# Altium PCB DSPboard.PCBDOC (part 2 of 2)
Units mil, origin at the board's own origin, x right, y up, seen from the top; angles counter-clockwise.
Board outline 6250 x 3000 mil, 4 copper layers (Top Layer, Internal Plane 1, Internal Plane 2, Bottom Layer); 133 components, 118 nets, 891 pads, 424 vias.
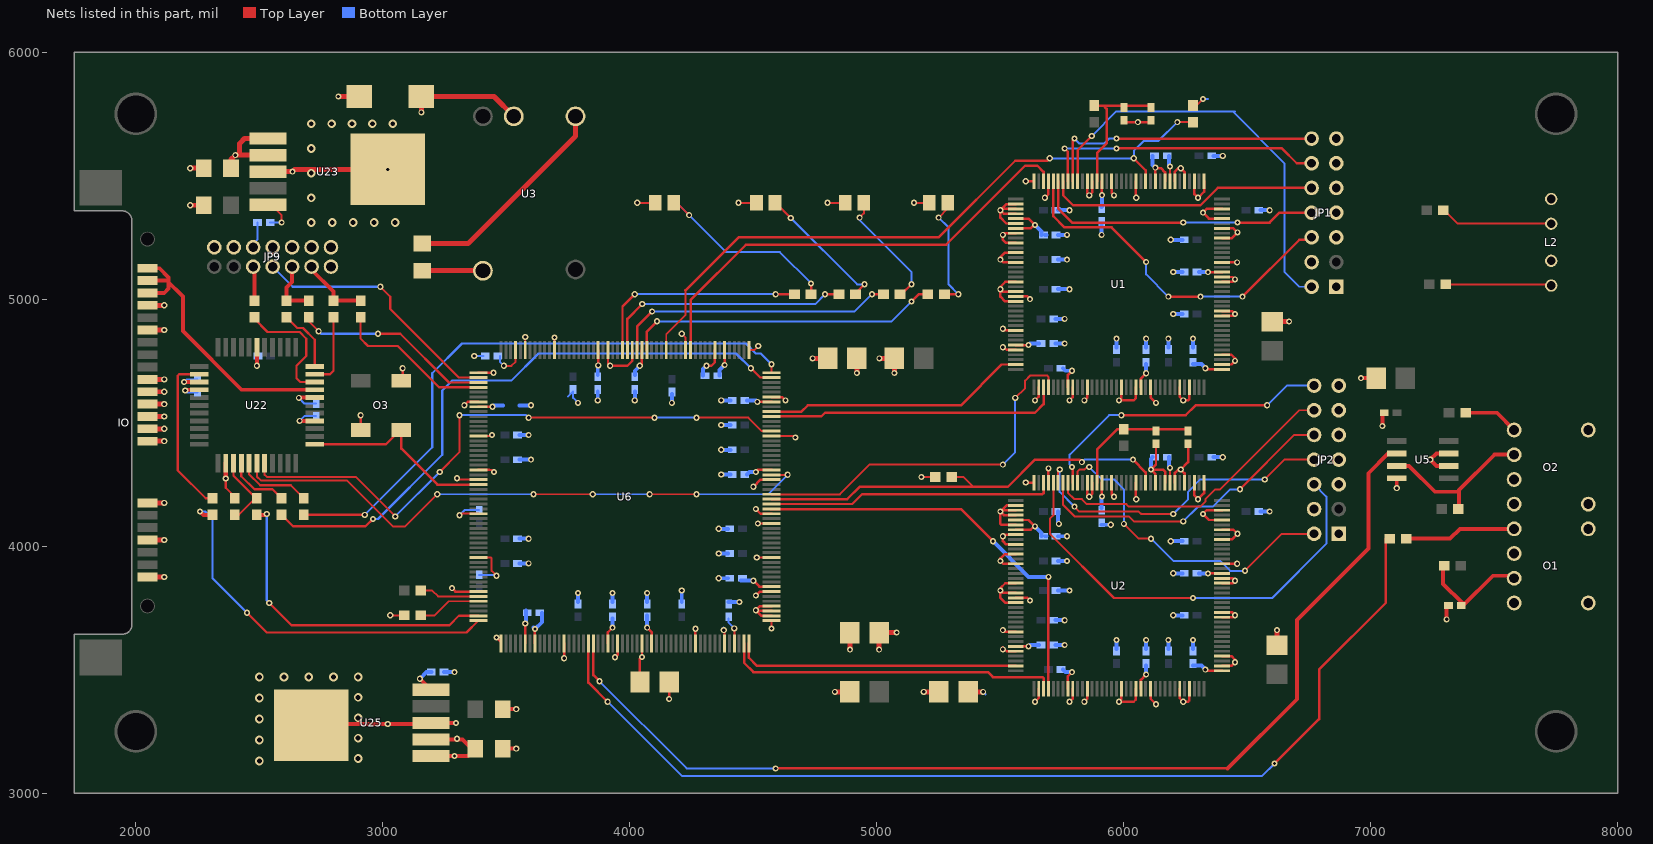
[diagram p4: the nets of this part, all layers, seen from the top]

## Via types
v1: diameter 25, hole 13.5, Top Layer to Bottom Layer, 398 vias
v2: diameter 35, hole 20, Top Layer to Bottom Layer, 26 vias

## Nets (pads, with @x,y where several pads share a name; then routed paths per layer and width w, separated by ;. In a path a pad name is that pad's centre, name@x,y a point inside that pad or via, vN(x,y) a via of type N, cw(c..) or ccw(c..) an arc to the next point about the centre after c; other vN are vias at no path point) (continued)
GND: C1.1 C2.1 C3.2 C6.2 C7.1 C8.1 C9.1 C10.1 C11.1 C12.1 C13.1 C14.1 C15.1 C16.1 C17.1 C18.1 C19.1 C20.1 C21.1 C22.1 C23.1 C24.1 C25.1 C26.1 C27.1 C28.1 C29.1 C30.1 C31.1 C35.1 C36.1 C37.1 C38.1 C39.1 C40.1 C41.1 C43.1 C44.1 C45.1 C46.1 C47.1 C48.1 C50.1 C51.1 C52.1 C53.1 C54.1 C57.1 C58.1 C59.1 C60.1 C62.1 C63.1 C64.1 C65.1 C66.1 C67.1 C68.1 C69.1 C70.1 C71.1 C74.1 C75.1 C76.1 C77.1 C78.1 C79.1 C80.1 C81.1 C82.1 C83.1 C84.1 C87.1 C88.1 C89.2 C92.2 C96.2 C98.2 C99.2 C100.2 C101.2 C102.2 C103.2 C106.2 C107.2 C108.2 DS1.2 DS2.2 DS3.2 DS4.2 IO.1 IO.4 IO.7 IO.P4 IO.P5 IO.P6 IO.P10 IO.P12 JP1.1 JP1.4 JP1.5 JP1.7 JP1.9 JP1.11 JP1.13 JP2.1 JP2.4 JP2.5 JP2.7 JP2.9 JP2.11 JP2.13 JP9.1 JP9.3 JP9.5 JP9.7 JP9.9 JP9.11 JP9.13 L2.2 L2.4 O1.2 O1.4 O1.5 O1.8 O2.3 O2.4 O2.5 O2.8 O3.2 R9.1 R15.2 R16.1 R27.2 U1.2 U1.3 U1.4 U1.6 U1.8 U1.10 U1.12 U1.14 U1.18 U1.20 U1.22 U1.28 U1.32 U1.38 U1.44 U1.48 U1.55 U1.58 U1.61 U1.67 U1.69 U1.74 U1.76 U1.84 U1.85 U1.91 U1.92 U1.95 U1.100 U1.102 U1.104 U1.106 U1.109 U1.111 U1.113 U1.115 U1.117 U1.119 U1.123 U1.128 U1.132 U1.133 U1.141 U2.2 U2.3 U2.4 U2.6 U2.8 U2.10 U2.12 U2.14 U2.18 U2.20 U2.22 U2.28 U2.32 U2.38 U2.44 U2.48 U2.55 U2.58 U2.61 U2.67 U2.69 U2.74 U2.76 U2.84 U2.85 U2.91 U2.92 U2.95 U2.100 U2.102 U2.104 U2.106 U2.109 U2.111 U2.113 U2.115 U2.117 U2.119 U2.123 U2.128 U2.132 U2.133 U2.141 U3.1 U5.4 U5.6 U5.7 U6.1 U6.8 U6.14 U6.25 U6.30 U6.41 U6.47 U6.53 U6.59 U6.66 U6.75 U6.82 U6.91 U6.99 U6.105 U6.112 U6.118 U6.129 U6.134 U6.145 U6.151 U6.157 U6.163 U6.170 U6.179 U6.186 U6.195 U6.202 U22.4 U22.17 U22.25 U23.3 U25.3 | length 15709.1
  Top Layer w8: v1(3030,3720) R9.1@3086.54,3720 ; v1@3300,4280 3311.1,4268.9 U6.179@3386.5,4268.9 ; v1@3310,4120 3321.1,4131.1 U6.186@3386.5,4131.1 ; U6.195@3386.5,3953.94 3436.06,3953.94 3440,3950 3440,3900 v1(3460,3880) ; U6.170@3386.5,4446.06 3446.06,4446.06 v1(3442.13,4450) ; U6.151@3576.46,4793.5 v1(3576.46,4846.46) ; U6.145@3694.57,4793.5 v1(3694.57,4844.57) ; U6.134@3911.1,4793.5 3911.1,4738.9 v1(3920,4730) ; v1(4030,5390) DS4.2@4100,5390 ; v1(4048.9,3551.1) U6.30@4048.9,3606.5 ; v1(4210,4860) 4226.06,4843.94 U6.118@4226.06,4793.5 ; v1(4380,3660) 4383.54,3656.46 U6.47@4383.54,3606.5 ; v1(4440,5390) DS3.2@4510,5390 ; U6.105@4481.97,4793.5 4503.5,4793.5 v1(4520,4810) ; v1(4513.94,3953.94) U6.66@4573.5,3953.94 ; v1(4573.5,3666.5) U6.53@4573.5,3698.03 ; U6.91@4573.5,4446.06 4663.94,4446.06 v1(4670,4440) ; v1(4800,5390) DS2.2@4880,5390 ; v1(5150,5390) DS1.2@5210,5390 ; v1(5180,4280) R15.2@5236.54,4280 ; R16.1@6280,5783.46 6293.46,5783.46 v1(6320,5810)
  Top Layer w10: O3.2@2910,4470 v1(2910,4530) ; v1(3280,3830) 3293.86,3816.14 U6.202@3386.5,3816.14 ; v1(3330,4570) 3343.86,4583.86 U6.163@3386.5,4583.86 ; U6.157@3386.5,4701.97 v1(3448.03,4701.97) ; v1(3460,3630) U6.1@3478.03,3611.97 ; U6.8@3615.83,3606.5 v1(3615.83,3664.17) ; v1(3733.94,3546.06) U6.14@3733.94,3606.5 ; v1(3920,4730) 3990,4730 4009.53,4749.53 U6.129@4009.53,4793.5 ; v1(3940,3550) 3950,3560 U6.25@3950,3610 ; C101.2@4040.94,3450 4040.94,3543.15 v1(4048.9,3551.1) ; U6.41@4265.43,3606.5 v1(4265.43,3665.43) ; v1(4310,4730) 4330,4730 4344.17,4744.17 U6.112@4344.17,4793.5 ; v1(4500,4240) 4528.9,4268.9 U6.82@4573.5,4268.9 ; v1(4510,3800) 4526.14,3816.14 U6.59@4573.5,3816.14 ; v1(4510,4150) 4528.9,4131.1 U6.75@4573.5,4131.1 ; U6.99@4573.5,4603.54 4616.46,4603.54 v1(4630,4590) ; v1(5500,3820) 5509.53,3810.47 U2.20@5562.68,3810.47 ; v1(5500,3940) 5511.42,3928.58 U2.14@5562.68,3928.58 ; v1@5500,3950 5517.95,3967.95 U2.12@5562.68,3967.95 ; v1(5500,5040) 5509.53,5030.47 U1.20@5562.68,5030.47 ; v1(5500,5160) 5511.42,5148.58 U1.14@5562.68,5148.58 ; v1@5500,5170 5517.95,5187.95 U1.12@5562.68,5187.95 ; v1@5505.12,4145.12 U2.3@5562.68,4145.12 ; v1@5505.12,5365.12 U1.3@5562.68,5365.12 ; v1@5510,3590 5525.75,3574.25 U2.32@5562.68,3574.25 ; v1(5510,3660) 5517.01,3652.99 U2.28@5562.68,3652.99 ; v1@5510,4810 5525.75,4794.25 U1.32@5562.68,4794.25 ; v1(5510,4880) 5517.01,4872.99 U1.28@5562.68,4872.99 ; U2.22@5562.68,3771.1 5518.9,3771.1 5500,3790 5500,3830 5519.84,3849.84 U2.18@5562.68,3849.84 ; U2.10@5562.68,4007.32 5522.68,4007.32 5510,4020 v1(5510,4040) 5516.69,4046.69 U2.8@5562.68,4046.69 ; U2.6@5562.68,4086.06 5503.94,4086.06 5500,4090 v1(5500,4140) ; U2.4@5562.68,4125.43 5514.57,4125.43 v1(5500,4140) ; U2.2@5562.68,4164.8 5524.8,4164.8 v1(5500,4140) ; U1.22@5562.68,4991.1 5518.9,4991.1 5500,5010 5500,5050 5519.84,5069.84 U1.18@5562.68,5069.84 ; U1.10@5562.68,5227.32 5522.68,5227.32 5510,5240 v1(5510,5260) 5516.69,5266.69 U1.8@5562.68,5266.69 ; U1.6@5562.68,5306.06 5523.94,5306.06 5500,5330 v1(5500,5360) ; U1.4@5562.68,5345.43 5514.57,5345.43 v1(5500,5360) ; U1.2@5562.68,5384.8 5524.8,5384.8 v1(5500,5360) ; v1(5640,3370) 5655.2,3385.2 U2.38@5655.2,3422.68 ; v1(5640,4590) 5655.2,4605.2 U1.38@5655.2,4642.68 ; v1(5680,5410) 5694.57,5424.57 U1.141@5694.57,5477.32 ; U2.141@5694.57,4257.32 v1(5694.57,4314.57) ; U2.44@5773.31,3422.68 5773.31,3473.31 v1(5790,3490) ; U1.44@5773.31,4642.68 5773.31,4693.31 v1(5790,4710) ; v1(5840,3370) 5852.05,3382.05 U2.48@5852.05,3422.68 ; v1(5840,4590) 5852.05,4602.05 U1.48@5852.05,4642.68 ; U2.133@5852.05,4257.32 5852.05,4207.95 v1(5860,4200) 5871.73,4211.73 U2.132@5871.73,4257.32 ; U1.133@5852.05,5477.32 5852.05,5427.95 v1(5860,5420) 5871.73,5431.73 U1.132@5871.73,5477.32 ; U2.128@5950.47,4257.32 5950.47,4209.53 v1(5960,4200) ; U1.128@5950.47,5477.32 5950.47,5429.53 v1(5960,5420) ; U2.55@5989.84,3422.68 5989.84,3379.84 v1(5980,3370) 6040,3370 6048.9,3378.9 U2.58@6048.9,3422.68 ; U1.55@5989.84,4642.68 5989.84,4599.84 v1(5980,4590) 6040,4590 6048.9,4598.9 U1.58@6048.9,4642.68 ; C1.1@6000,5716.54 C2.1@6110,5716.54 ; U2.123@6048.9,4257.32 6048.9,4191.1 v1(6050,4190) ; U1.123@6048.9,5477.32 6048.9,5411.1 v1(6050,5410) ; U2.61@6107.95,3422.68 6107.95,3382.05 v1(6130,3360) ; U1.61@6107.95,4642.68 6107.95,4602.05 v1(6130,4580) ; U2.119@6127.64,4257.32 6127.64,4292.36 v1(6110,4310) ; U1.119@6127.64,5477.32 v1(6127.64,5532.36) ; C30.1@6130,4406.54 6130,4330 v1(6110,4310) ; 6140,5530 6150,5530 6167.01,5512.99 U1.117@6167.01,5477.32 ; U2.117@6167.01,4257.32 6167.01,4302.11 6159.11,4310 v1(6110,4310) ; U2.115@6206.38,4257.32 6206.38,4296.38 6220,4310 v1(6230,4310) ; U1.115@6206.38,5477.32 6206.38,5516.38 6220,5530 v1(6230,5530) 6245.75,5514.25 U1.113@6245.75,5477.32 ; U2.67@6226.06,3422.68 6226.06,3383.94 v1(6240,3370) 6260,3370 6265.43,3375.43 U2.69@6265.43,3422.68 ; U1.67@6226.06,4642.68 6226.06,4603.94 v1(6240,4590) 6260,4590 6265.43,4595.43 U1.69@6265.43,4642.68 ; U2.113@6245.75,4257.32 6245.75,4294.25 v1(6230,4310) ; C29.1@6260,4406.54 6260,4340 v1(6230,4310) ; U2.111@6285.12,4257.32 6285.12,4204.88 v1(6300,4190) 6324.49,4214.49 U2.109@6324.49,4257.32 ; U1.111@6285.12,5477.32 6285.12,5424.88 v1(6300,5410) 6324.49,5434.49 U1.109@6324.49,5477.32 ; U2.74@6397.32,3515.2 6435.2,3515.2 v1(6450,3530) 6450,3540 6435.43,3554.57 U2.76@6397.32,3554.57 ; U2.84@6397.32,3712.05 6442.05,3712.05 v1(6450,3720) 6438.27,3731.73 U2.85@6397.32,3731.73 ; U2.91@6397.32,3849.84 6439.84,3849.84 v1(6450,3860) 6440.47,3869.53 U2.92@6397.32,3869.53 ; U2.95@6397.32,3928.58 v1(6458.58,3928.58) ; U2.100@6397.32,4027.01 6437.01,4027.01 v1(6460,4050) 6443.62,4066.38 U2.102@6397.32,4066.38 ; U2.104@6397.32,4105.75 6344.25,4105.75 v1(6320,4130) 6335.12,4145.12 U2.106@6397.32,4145.12 ; U1.74@6397.32,4735.2 6435.2,4735.2 v1(6450,4750) 6450,4760 6435.43,4774.57 U1.76@6397.32,4774.57 ; U1.84@6397.32,4932.05 6442.05,4932.05 v1(6450,4940) 6438.27,4951.73 U1.85@6397.32,4951.73 ; U1.91@6397.32,5069.84 6439.84,5069.84 v1(6450,5080) 6440.47,5089.53 U1.92@6397.32,5089.53 ; U1.95@6397.32,5148.58 v1(6458.58,5148.58) ; U1.100@6397.32,5247.01 6437.01,5247.01 v1(6460,5270) 6443.62,5286.38 U1.102@6397.32,5286.38 ; U1.104@6397.32,5325.75 6344.25,5325.75 v1(6320,5350) 6335.12,5365.12 U1.106@6397.32,5365.12
  Top Layer w16: v1(2195.51,4664.49) U22.25@2255.75,4664.49 ; v1(2490,4730) U22.17@2490,4804.25 ; v1(2662.99,4507.01) U22.4@2724.25,4507.01 ; U25.3@2710,3275 2715,3280 U25.3@3200,3280 ; U25.3@3195,3284 v1(3296,3284) ; C87.1@3480,3180 v1(3540,3180) ; C88.1@3480,3340 v1(3540,3340) ; v1(6960,4680) C108.2@7020.94,4680 ; v1(7046.54,4486.54) C106.2@7046.54,4540 ; v1(7104.69,4234.69) U5.4@7104.69,4275 ; v1(7306.54,3703.46) C107.2@7306.54,3760 ; U5.6@7315.31,4325 7265,4325 v1(7240,4350) 7265,4375 U5.7@7315.31,4375
  Top Layer w20: IO.1@2047.24,3875 v1(2115,3875) ; IO.4@2047.24,4025 v1(2115,4025) ; IO.7@2047.24,4175 v1(2115,4175) ; IO.P4@2047.24,4575 v1(2115,4575) ; IO.P5@2047.24,4625 v1(2115,4625) ; IO.P6@2047.24,4675 v1(2115,4675) ; IO.P10@2047.24,4875 v1(2115,4875) ; IO.P12@2047.24,4975 v1(2115,4975) ; v1(2220,5380) C82.1@2274.88,5380 ; v1(2220,5530) C81.1@2274.88,5530 ; U23.3@2535,5516 v1(2634,5516) ; 2643,5525 v1(3020,5525) ; v1(2820,5820) C6.2@2900,5820 ; R27.2@3160,5225.12 3345.12,5225.12 3780,5660 U3.1@3780,5740 ; v1(4740,4760) C103.2@4800.94,4760 ; v1(4830,3410) C96.2@4890.94,3410 ; v1(4890.94,3580.94) C92.2@4890.94,3650 ; v1(5010,4760) C98.2@5070.94,4760 v1(5070.94,4700.94) ; v1(5190,3410) C99.2@5250.94,3410 ; C100.2@6600,4909.06 v1(6669.06,4909.06) ; C102.2@6620,3599.06 v1(6620,3660)
  Bottom Layer w8: v1(2195.51,4664.49) 2204.86,4673.84 C21.1@2250,4673.84 ; JP9.9@2470,5220 2492.66,5242.66 C3.2@2492.66,5310 ; v1(2490,4730) C14.1@2490,4765.59 ; v1(2662.99,4507.01) 2682.14,4526.16 C27.1@2730,4526.16 ; v1(3310,4125) 3330.59,4145.59 C31.1@3390,4145.59 ; v1(3370,4770) C83.1@3406.54,4770 ; C28.1@3390,3883.84 v1@3456.16,3883.84 ; v1@3440,4450 v1(3442.13,4450) ; 3750,4606.54 3770,4626.54 3770,4600 v1(3790,4580) ; v1(4380,3660) v1@4380,3670 ; v1@4510,3950 v1(4513.94,3953.94) ; v1(6320,5810) 6340,5810 ; v1(6669.06,4909.06) v1@6670,4910
  Bottom Layer w16: C89.2@3247.34,3490 v1(3290,3490) ; C62.1@3553.46,3930 v1(3590,3930) ; C58.1@3553.46,4030 v1(3590,4030) ; C57.1@3553.46,4350 v1(3600,4350) ; C63.1@3553.46,4450 v1(3590,4450) ; 3553.46,4570 v1(3600,4570) ; v1@3610,3670 v1(3615.83,3664.17) 3643.46,3691.81 C84.1@3643.46,3730 ; C69.1@3790,3773.46 v1(3790,3810) ; v1(3870,4590) C70.1@3870,4626.54 ; C74.1@3930,3773.46 v1(3930,3810) ; v1(4020,4590) C71.1@4020,4626.54 ; C75.1@4070,3773.46 v1(4070,3810) ; v1(4170,4580) C65.1@4170,4616.54 ; C68.1@4210,3773.46 v1(4210,3820) ; C80.1@4296.54,4690 4296.54,4716.54 v1(4310,4730) ; v1(4360,3870) C77.1@4396.54,3870 ; v1(4360,3970) C67.1@4396.54,3970 ; v1(4360,4070) C59.1@4396.54,4070 ; v1(4370,4290) C78.1@4406.54,4290 ; v1(4370,4390) C60.1@4406.54,4390 ; v1(4370,4490) C66.1@4406.54,4490 ; v1(4370,4590) C79.1@4406.54,4590 ; C76.1@4400,3773.46 v1(4443.46,3773.46) ; C39.1@5723.46,3600 v1(5760,3600) ; C38.1@5723.46,3700 v1(5760,3700) ; C11.1@5723.46,4820 v1(5760,4820) ; C10.1@5723.46,4920 v1(5760,4920) ; C37.1@5733.46,3820 v1(5780,3820) ; C36.1@5733.46,3940 v1(5770,3940) ; C41.1@5733.46,4040 v1(5770,4040) ; C35.1@5733.46,4140 5733.46,4093.46 v1(5736.93,4090) ; C9.1@5733.46,5040 v1(5780,5040) ; C8.1@5733.46,5160 v1(5770,5160) ; C13.1@5733.46,5260 v1(5770,5260) ; C7.1@5733.46,5360 v1(5780,5360) ; C40.1@5753.46,3500 5763.46,3490 v1(5790,3490) ; C12.1@5753.46,4720 5763.46,4710 v1(5790,4710) ; C51.1@5910,4086.54 v1(5946.54,4086.54) ; v1(5910,5260) C23.1@5910,5306.54 ; C44.1@5970,3583.46 v1(5970,3620) ; C16.1@5970,4803.46 v1(5970,4840) ; C43.1@6090,3583.46 v1(6090,3620) ; C15.1@6090,4803.46 v1(6090,4840) ; v1(6110,4310) 6110,4353.46 C53.1@6116.54,4360 ; C25.1@6116.54,5580 6116.54,5543.46 v1(6127.64,5532.36) ; C46.1@6180,3583.46 v1(6180,3620) ; C18.1@6180,4803.46 v1(6180,4840) ; v1(6190,4020) C50.1@6236.54,4020 ; v1(6190,5240) C22.1@6236.54,5240 ; v1(6200,3720) C48.1@6236.54,3720 ; v1(6200,3890) C47.1@6236.54,3890 ; v1(6200,4940) C20.1@6236.54,4940 ; v1(6200,5110) C19.1@6236.54,5110 ; C45.1@6280,3583.46 v1(6280,3620) ; C17.1@6280,4803.46 v1(6280,4840) ; C54.1@6363.46,4360 v1(6400,4360) ; C26.1@6363.46,5580 v1(6400,5580) ; C52.1@6553.46,4140 v1(6590,4140) ; C24.1@6553.46,5360 v1(6590,5360)
  other v1: 3020,3280 5510,3582 3300,4275 5510,4805 6056.54,5716.54
  other v2: 2500,3130 2900,3140 2500,3215 2900,3222.5 2500,3300 2900,3305 2500,3385 2900,3387.5 2500,3470 2600,3470 2700,3470 2800,3470 2900,3470 2710,5310 2795,5310 2880,5310 2965,5310 3050,5310 2710,5410 2710,5510 2710,5610 2710,5710 2792.5,5710 2875,5710 2957.5,5710 3040,5710
NetC1_2: C1.2 C2.2 R1.2 U1.131 | length 557.7
  Top Layer w10: R1.2@5880,5783.46 C2.2@6110,5783.46 ; U1.131@5891.42,5477.32 5891.42,5591.42 5930,5630 5930,5770 5916.54,5783.46
NetC3_1: C3.1 U23.5 | length 156.9
  Top Layer w8: U23.5@2530,5390 2540,5390 2590,5340 v1(2590,5310)
  Bottom Layer w8: C3.1@2543.84,5310 v1(2590,5310)
NetC29_2: C29.2 C30.2 R2.2 U2.131 | length 536.7
  Top Layer w10: U2.131@5891.42,4257.32 5891.42,4391.42 5973.46,4473.46 C29.2@6260,4473.46
NetC89_1: C89.1 U25.5 | length 121
  Top Layer w16: v1(3150,3463) U25.5@3195,3418
  Bottom Layer w16: v1(3150,3463) 3177,3490 C89.1@3196.16,3490
NetC107_1: C107.1 O1.3 R21.2 | length 438.3
  Top Layer w16: R21.2@7292.6,3920 7292.6,3847.4 C107.1@7370,3770 ; C107.1@7373.46,3760 7493.46,3880 O1.3@7580,3880
NetDS1_1: DS1.1 R3.2 | length 475.2
  Top Layer w8: v1(5250,5330) 5287.4,5367.4 DS1.1@5287.4,5390
  Top Layer w10: R3.2@5273.46,5020 v1(5330,5020)
  Bottom Layer w8: v1(5250,5330) 5290,5290 5290,5060 v1(5330,5020)
NetDS2_1: DS2.1 R4.2 | length 477.3
  Top Layer w8: v1(4930,5330) 4947.4,5347.4 DS2.1@4947.4,5390
  Top Layer w10: R4.2@5093.46,5020 5100,5020 v1(5140,5060)
  Bottom Layer w8: v1@4930,5320 5140,5110 v1(5140,5060)
NetDS3_1: DS3.1 R5.2 | length 554.4
  Top Layer w8: DS3.1@4587.4,5390 4590,5390 v1(4651.59,5328.41)
  Top Layer w10: R5.2@4913.46,5020 4913.46,5023.46 v1(4950,5060)
  Bottom Layer w8: v1(4651.59,5328.41) 4920,5060 v1(4950,5060)
NetDS4_1: DS4.1 R6.2 | length 805.5
  Top Layer w8: DS4.1@4177.4,5390 4190,5390 v1(4240,5340)
  Top Layer w10: R6.2@4733.46,5020 v1(4733.46,5063.46)
  Bottom Layer w8: 4190,5390 4390,5190 4606.93,5190 v1(4733.46,5063.46)
NetIO_P13: IO.P13 IO.P14 IO.P15 U22.8 | length 1180.8
  Top Layer w16: IO.P13@2047.24,5025 2115,5025 2132.92,5042.92 2132.92,5087.08 2095,5125 IO.P15@2047.24,5125 ; IO.P14@2047.24,5075 2125,5075 2190,5010 2190,4870 2427.01,4632.99 U22.8@2724.25,4632.99
NetJP1_2: JP1.2 U1.135 | length 1699.7
  Top Layer w10: U1.135@5812.68,5477.32 5812.68,5602.68 v1(5870,5660)
  Bottom Layer w8: v1(5870,5660) 5970,5760 6450,5760 ; 6440,5760 6650,5550 6650,5110 6710,5050 JP1.2@6760,5050
NetJP1_6: JP1.6 U1.140 | length 1446.8
  Top Layer w10: U1.140@5714.25,5477.32 5714.25,5335.75 5760,5290 5950,5290 v1(6090,5150) ; v1(6180,5010) v1(6310,5010) ; v1(6480,5010) 6710,5240 JP1.6@6760,5240
  Bottom Layer w8: v1(6090,5150) 6090,5100 v1(6180,5010) ; v1(6310,5010) v1(6480,5010)
NetJP1_8: JP1.8 U1.139 | length 1177.1
  Top Layer w10: U1.139@5733.94,5477.32 5733.94,5366.06 5790,5310 v1(6240,5310) ; v1(6460,5310) 6590,5310 6630,5350 JP1.8@6760,5350
  Bottom Layer w8: v1(6240,5310) v1(6460,5310)
NetJP1_10: JP1.10 U1.138 | length 1109
  Top Layer w10: U1.138@5753.62,5477.32 5753.62,5420.53 5794.15,5380 6310,5380 6380,5450 JP1.10@6760,5450
NetJP1_12: JP1.12 U1.137 | length 1163
  Top Layer w10: v1(5760,5610) 5773.31,5596.69 U1.137@5773.31,5477.32 ; v1(5970,5610) 6640,5610 6700,5550 JP1.12@6760,5550
  Bottom Layer w8: v1(5760,5610) v1(5970,5610)
NetJP1_14: JP1.14 U1.136 | length 1152.1
  Top Layer w10: U1.136@5792.99,5477.32 5792.99,5642.99 v1(5800,5650) ; v1(5970,5650) JP1.14@6760,5650
  Bottom Layer w8: v1(5800,5650) 5820,5630 5920,5630 5940,5650 v1(5970,5650)
NetJP2_2: JP2.2 U2.135 | length 1328
  Top Layer w8: U2.135@5812.68,4257.32 5812.68,4302.68 5820,4310 5840,4310 5850,4320 v1(5860,4320) ; v1(6000,4090) 6060,4030 v1(6110,4030) ; v1(6490,3900) 6640,4050 JP2.2@6770,4050
  Bottom Layer w8: v1(5860,4320) 5910,4270 5960,4270 6000,4230 v1(6000,4090) ; v1(6110,4030) 6200,3940 6390,3940 6430,3900 v1(6490,3900)
NetJP2_6: JP2.6 U2.140 | length 1792.8
  Top Layer w8: U2.140@5714.25,4257.32 5714.25,4124.25 5700,4110 5700,4050 5960,3790 v1(6280,3790)
  Bottom Layer w8: v1(6280,3790) 6600,3790 6820,4010 6820,4200 JP2.6@6770,4250
NetJP2_8: JP2.8 U2.139 | length 1321.2
  Top Layer w8: U2.139@5733.94,4257.32 5733.94,4303.94 v1(5740,4310) ; v1(5800,4160) 5820,4140 6060,4140 6070,4130 v1(6200,4130) ; v1(6570,4270) 6650,4350 JP2.8@6770,4350
  Bottom Layer w8: v1(5740,4310) 5740,4220 v1(5800,4160) ; v1(6200,4130) 6260,4190 6260,4220 6310,4270 v1(6570,4270)
NetJP2_10: JP2.10 U2.138 | length 1279.8
  Top Layer w8: U2.138@5753.62,4257.32 5753.62,4166.38 5800,4120 6020,4120 6040,4100 v1(6240,4100) ; v1(6470,4230) 6690,4450 JP2.10@6770,4450
  Bottom Layer w8: v1(6240,4100) 6300,4160 6360,4160 6430,4230 v1(6470,4230)
NetJP2_12: JP2.12 U2.137 | length 1228.2
  Top Layer w8: U2.137@5773.31,4257.32 5773.31,4216.69 5800,4190 5830,4190 5850,4170 6010,4170 6020,4160 6310,4160 6330,4180 6330,4190 6370,4230 6390,4230 6710,4550 JP2.12@6770,4550
NetJP2_14: JP2.14 U2.136 | length 1224
  Top Layer w10: v1(5790,4320) 5792.99,4317.01 U2.136@5792.99,4257.32 ; v1(5990,4530) 6250,4530 6290,4570 v1(6580,4570)
  Bottom Layer w8: v1(5790,4320) 5780,4330 5780,4370 5940,4530 v1(5990,4530) ; v1(6580,4570) 6660,4650 JP2.14@6770,4650
NetL2_1: L2.1 R25.2 | length 434.1
  Top Layer w8: R25.2@7300,5070 7310,5060 L2.1@7730,5060
NetL2_3: L2.3 R26.2 | length 455.3
  Top Layer w8: R26.2@7297.4,5360 7352.2,5305.2 L2.3@7730,5305.2
NetO1_1: O1.1 R22.2 | length 449.2
  Top Layer w16: R22.2@7147.4,4030 7320,4030 7360,4070 O1.1@7580,4070
NetO2_1: O2.1 R24.1 | length 221.6
  Top Layer w16: R24.1@7387.4,4540 7510,4540 O2.1@7580,4470
NetO2_2: O2.2 R23.1 U5.3 | length 655.3
  Top Layer w16: U5.3@7104.69,4325 7155,4325 7260,4220 7357.4,4220 ; R23.1@7357.4,4150 7357.4,4227.4 7500,4370 O2.2@7580,4370
NetO3_3: O3.3 U6.180 U22.1 | length 830.4
  Top Layer w10: U22.1@2724.25,4412.52 3012.52,4412.52 O3.3@3080,4480 ; O3.3@3075.35,4470 3075.35,4394.65 3220.79,4249.21 U6.180@3386.5,4249.21
NetR3_1: R3.1 U6.126 | length 1275.8
  Top Layer w10: U6.126@4068.58,4793.5 4068.58,4868.58 v1(4110,4910) ; v1(5140,4990) 5170,5020 R3.1@5206.54,5020
  Bottom Layer w8: v1(4110,4910) 5060,4910 v1(5140,4990)
NetR4_1: R4.1 U6.128 | length 1147.2
  Top Layer w10: U6.128@4029.21,4793.5 4029.21,4889.21 v1(4090,4950) ; v1(4980,5020) R4.1@5026.54,5020
  Bottom Layer w8: v1(4090,4950) 4910,4950 v1(4980,5020)
NetR5_1: R5.1 U6.130 | length 1024.5
  Top Layer w10: U6.130@3989.84,4793.5 3989.84,4919.84 v1(4050,4980) ; v1(4790,5020) R5.1@4846.54,5020
  Bottom Layer w8: v1(4050,4980) 4750,4980 v1(4790,5020)
NetR6_1: R6.1 U6.131 | length 893.7
  Top Layer w10: U6.131@3970.16,4793.5 3970.16,4970.16 v1(4020,5020) ; v1(4590,5020) R6.1@4666.54,5020
  Bottom Layer w8: v1(4020,5020) v1(4590,5020)
NetR7_1: R7.1 U6.104 | length 2425.6
  Top Layer w9: R7.1@2680,4126.54 v1(2926.54,4126.54) ; U6.104@4573.5,4701.97 v1(4573.5,4736.5)
  Bottom Layer w9: v1(2926.54,4126.54) 3200,4400 3200,4700 3320,4820 4470,4820 4510,4780 4530,4780 v1(4573.5,4736.5)
NetR7_2: R7.2 U22.38 | length 306.4
  Top Layer w9: U22.38@2458.5,4335.75 2458.5,4291.5 2504,4246 2627.46,4246 R7.2@2680,4193.46
NetR8_2: R8.2 U6.203 | length 242.8
  Top Layer w8: R8.2@3153.46,3820 3200,3820 3223.54,3796.46 U6.203@3386.5,3796.46
NetR9_2: R9.2 U6.204 | length 256.5
  Top Layer w8: R9.2@3153.46,3720 3210,3720 3266.77,3776.77 U6.204@3386.5,3776.77
NetR10_2: R10.2 U6.159 | length 805.5
  Top Layer w9: R10.2@2700,4926.54 2700,4910 v1(2740,4870) ; v1(2980,4860) 3070,4860 3267.4,4662.6 U6.159@3386.5,4662.6
  Bottom Layer w9: v1(2740,4870) 2750,4860 v1(2980,4860)
NetR11_1: R11.1 U22.11 | length 261.1
  Top Layer w9: R11.1@2613.46,4923.07 2653.56,4882.98 2677.02,4882.98 2724.25,4835.75 U22.11@2724.25,4727.48
  Top Layer w16: R11.1@2610,4926.54 2613.46,4926.54 R11.1@2615.2,4924.8
NetR12_1: R12.1 U22.24 | length 658.5
  Top Layer w9: U22.24@2255.75,4695.98 2175.99,4695.98 2170,4690 2170,4306.54 2283.07,4193.46 R12.1@2310,4193.46
NetR12_2: R12.2 U6.208 | length 1545.5
  Top Layer w9: v1(2450,3730) 2530,3650 3338.46,3650 U6.208@3386.5,3698.03
  Top Layer w16: v1(2260,4140) 2273.46,4126.54 R12.2@2310,4126.54
  Bottom Layer w9: v1(2260,4140) 2280,4140 2310,4110 2310,3870 v1(2450,3730)
NetR13_1: R13.1 U6.160 | length 644.7
  Top Layer w9: R13.1@2910,4926.54 2910,4840 2940,4810 3060,4810 3227.09,4642.91 U6.160@3386.5,4642.91
NetR14_1: R14.1 U22.10 | length 298.1
  Top Layer w9: U22.10@2724.25,4695.98 2785.99,4695.98 2800,4710 R14.1@2800,4926.54
NetR15_1: R15.1 U2.121 U6.78 | length 1755
  Top Layer w8: R15.1@5303.46,4280 5350,4280 5390,4240
  Top Layer w10: U6.78@4573.5,4190.16 4880.16,4190.16 4930,4240 5530,4240 5640,4350 5820,4350 v1(5830,4340) ; v1(6036.96,4350) 6088.27,4298.69 U2.121@6088.27,4257.32
  Bottom Layer w8: v1(5830,4340) 5840,4350 v1(6036.96,4350)
NetR16_2: R16.2 U1.121 U6.122 | length 2741.2
  Top Layer w8: U6.122@4147.32,4793.5 4147.32,4857.32 4225.1,4935.1 4225.1,5035.1 ; v1(6216.54,5716.54) R16.2@6280,5716.54
  Top Layer w10: 4225.1,5035.1 4440,5250 5250,5250 5560,5560 5690,5560 v1(5700,5570) ; v1(6040,5570) 6088.27,5521.73 U1.121@6088.27,5477.32
  Bottom Layer w8: v1(5700,5570) v1(6040,5570) 6040,5600 6080,5640 6140,5640 v1(6216.54,5716.54)
NetR17_1: R17.1 U6.103 | length 2485.5
  Top Layer w9: R17.1@2590,4126.54 2636.54,4080 2930,4080 v1(2960,4110) ; v1(4490,4720) 4527.72,4682.28 U6.103@4573.5,4682.28
  Bottom Layer w9: v1(2960,4110) 2980,4110 3240,4370 3240,4630 3280,4670 3520,4670 3630,4780 4430,4780 v1(4490,4720)
NetR17_2: R17.2 U22.37 | length 252.8
  Top Layer w9: U22.37@2427.01,4335.75 2427.01,4282.99 2480,4230 2553.46,4230 R17.2@2590,4193.46
NetR18_1: R18.1 R20.2 U22.36 | length 303.9
  Top Layer w9: U22.36@2395.51,4335.75 2395.51,4284.49 2486.54,4193.46 R20.2@2490,4193.46 ; R18.1@2400,4126.54 2416.54,4126.54 R20.2@2490,4200
NetR19_1: R19.1 U22.9 | length 500.4
  Top Layer w9: R19.1@2480,4920 2533.02,4866.98 2663.02,4866.98 2690,4840 2690,4770 2650,4730 2650,4680 2665.51,4664.49 U22.9@2724.25,4664.49
NetR20_1: R20.1 U6.207 | length 1305
  Top Layer w9: v1(2540,3770) 2630,3680 3270,3680 3307.72,3717.72 U6.207@3386.5,3717.72
  Top Layer w16: R20.1@2490,4126.54 2526.54,4126.54 v1(2530,4130)
  Bottom Layer w9: v1(2530,4130) 2530,3780 v1(2540,3770)
NetR22_1: R22.1 U6.19 | length 4210
  Top Layer w10: U6.19@3832.36,3606.5 3832.36,3447.64 v1(3910,3370) ; v1(6610,3120) 6790,3300 6790,3500 7060,3770 R22.1@7060,4030
  Bottom Layer w8: v1(3910,3370) 4210,3070 6560,3070 v1(6610,3120)
NetR27_1: R27.1 U3.4 | length 250
  Top Layer w20: R27.1@3155,5115 U3.4@3405,5115
NetU1_35: U1.35 U6.96 | length 1068.2
  Top Layer w10: U6.96@4573.5,4544.49 4694.49,4544.49 4720,4570 5340,4570 5505.2,4735.2 U1.35@5562.68,4735.2
NetU1_39: U1.39 U6.95 | length 1189.9
  Top Layer w10: U6.95@4573.5,4524.8 4774.8,4524.8 4790,4540 5640,4540 5674.88,4574.88 U1.39@5674.88,4642.68
NetU1_40: U1.40 U6.79 | length 1511
  Top Layer w8: U6.79@4573.5,4209.84 4849.84,4209.84 4970,4330 v1(5510,4330) ; v1(5560,4600) 5600,4640 5600,4670 5620,4690 5690,4690 5694.57,4685.43 U1.40@5694.57,4642.68
  Bottom Layer w8: v1(5510,4330) 5560,4380 v1(5560,4600)
NetU1_142: U1.142 U6.117 | length 1904.9
  Top Layer w10: U6.117@4245.75,4793.5 4245.75,4995.75 4470,5220 5280,5220 5600,5540 5650,5540 5674.88,5515.12 U1.142@5674.88,5477.32
NetU2_35: U2.35 U6.52 | length 1152.8
  Top Layer w10: U6.52@4481.97,3606.5 4481.97,3548.03 4514.8,3515.2 U2.35@5562.68,3515.2
NetU2_39: U2.39 U6.51 | length 1359.7
  Top Layer w10: U6.51@4462.28,3606.5 4462.28,3527.72 4500,3490 5450,3490 5470,3470 5670,3470 5674.88,3465.12 U2.39@5674.88,3422.68
NetU2_40: U2.40 U6.76 | length 1691.1
  Top Layer w10: U6.76@4570,4150 5340,4150 v1(5470,4020) ; U2.40@5694.57,3422.68 v1(5694.57,3875.43)
  Bottom Layer w16: v1(5470,4020) 5614.57,3875.43 v1(5694.57,3875.43)
NetU2_142: U2.142 U6.77 | length 1162.2
  Top Layer w10: U6.77@4573.5,4170.47 4900.47,4170.47 4940,4210 5670,4210 5674.88,4214.88 U2.142@5674.88,4257.32
NetU5_2: U5.2 U6.20 | length 4388.7
  Top Layer w10: U6.20@3852.05,3597.95 3852.05,3477.95 v1(3876.74,3453.26) ; v1(4590,3100) 6420,3100
  Top Layer w16: 6420,3100 6700,3380 6700,3700 6990,3990 6990,4295 U5.2@7070,4375
  Bottom Layer w8: v1(3876.74,3453.26) 4230,3100 v1(4590,3100)
NetU6_83: U6.83 U22.39 | length 2431.8
  Top Layer w8: U22.39@2490,4330 2490,4281.92 2506.92,4265 2855,4265 3040,4080 3090,4080 v1(3220,4210) ; v1(3610,4210) v1(3850,4210) ; v1(4080,4210) v1(4270,4210) ; U6.83@4573.5,4288.58 v1(4638.58,4288.58)
  Bottom Layer w8: v1(3220,4210) v1(3610,4210) ; v1(3850,4210) v1(4080,4210) ; v1(4270,4210) 4560,4210 v1(4638.58,4288.58)
NetU6_92: U6.92 U22.40 | length 2453.4
  Top Layer w8: U22.40@2521.5,4335.75 2521.5,4288.5 2530,4280 2890,4280 v1(3050,4120) ; v1(3230,4300) 3310,4380 v1(3310,4530) ; v1(3590,4520) v1(4100,4520) ; v1(4270,4520) 4480,4520 4534.25,4465.75 U6.92@4573.5,4465.75
  Bottom Layer w8: v1(3050,4120) v1(3230,4300) ; v1(3310,4530) 3580,4530 v1(3590,4520) ; v1(4100,4520) v1(4270,4520)
TCK: JP9.6 R10.1 R11.2 | length 237.1
  Top Layer w16: JP9.6@2632.52,5131.26 2632.52,5070 2610,5047.48 R11.2@2610,4993.46 R10.1@2700,4993.46
TDI: JP9.10 R19.2 | length 132.8
  Top Layer w16: R19.2@2480,4993.46 JP9.10@2480,5126.3
TDO: JP9.8 U6.158 | length 1048
  Top Layer w9: v1(2990,5050) 3030,5010 3030,4960 3307.72,4682.28 U6.158@3386.5,4682.28
  Bottom Layer w9: JP9.8@2553.78,5131.26 2635.04,5050 v1(2990,5050)
TMS: JP9.4 R13.2 R14.2 | length 284.6
  Top Layer w16: JP9.4@2711.26,5131.26 2711.26,5118.74 2800,5030 R14.2@2800,4993.46 R13.2@2910,4993.46
VCC: C6.1 C11.2 C13.2 C15.2 C17.2 C19.2 C21.2 C23.2 C25.2 C27.2 C39.2 C41.2 C43.2 C45.2 C47.2 C51.2 C53.2 C70.2 C71.2 C74.2 C75.2 C76.2 C77.2 C78.2 C79.2 C80.2 C81.2 C83.2 C84.2 C87.2 C92.1 C99.1 C101.1 C103.1 IO.P1 IO.P2 IO.P3 JP9.2 O3.4 R18.2 U1.5 U1.7 U1.21 U1.31 U1.45 U1.59 U1.73 U1.93 U1.116 U1.130 U1.144 U2.5 U2.7 U2.21 U2.31 U2.45 U2.59 U2.73 U2.93 U2.116 U2.130 U2.144 U3.2 U6.6 U6.23 U6.32 U6.49 U6.54 U6.55 U6.56 U6.60 U6.73 U6.84 U6.98 U6.110 U6.127 U6.136 U6.153 U6.164 U6.177 U22.7 U22.26 U22.35 U23.1 U23.2 U25.1 U25.2 | length 6020.5
  Top Layer w8: U6.177@3386.5,4308.27 3441.73,4308.27 v1(3450,4300) ; v1(3490,4730) 3520,4730 3537.09,4747.09 U6.153@3537.09,4793.5 ; U6.49@4422.91,3606.5 v1(4422.91,3667.09) ; v1(4518.27,4091.73) U6.73@4573.5,4091.73
  Top Layer w9: v1(2364.02,4274.02) 2364.02,4235.98 2400,4200 R18.2@2400,4190
  Top Layer w10: O3.4@3080,4670 v1(3080,4720) ; U6.177@3386.5,4308.27 3431.73,4308.27 ; U6.164@3386.5,4564.17 v1(3444.17,4564.17) ; U6.6@3576.46,3606.5 v1(3576.46,3686.46) ; v1(3871.73,4731.73) U6.136@3871.73,4793.5 ; U6.23@3911.1,3606.5 3911.1,3651.1 v1(3930,3670) ; v1(4040,4730) 4048.9,4738.9 U6.127@4048.9,4793.5 ; v1(4070,3670) 4088.27,3651.73 U6.32@4088.27,3606.5 ; v1(4159.06,3380.94) C101.1@4159.06,3450 ; v1(4383.54,4733.54) U6.110@4383.54,4793.5 ; v1(4500,3860) 4524.17,3835.83 U6.60@4573.5,3835.83 ; v1(4510,4300) 4518.27,4308.27 U6.84@4573.5,4308.27 ; v1@4512.6,3737.4 U6.55@4573.5,3737.4 ; v1(4516.14,4583.86) U6.98@4573.5,4583.86 ; U6.54@4573.5,3717.72 4532.28,3717.72 v1(4510,3740) 4527.09,3757.09 U6.56@4573.5,3757.09 ; U2.31@5562.68,3593.94 v1(5613.94,3593.94) ; U2.21@5562.68,3790.79 5609.21,3790.79 v1(5620,3780) ; U2.7@5562.68,4066.38 5622.53,4066.38 v1@5638.07,4081.93 ; U2.5@5562.68,4105.75 5614.25,4105.75 v1(5640,4080) ; U1.31@5562.68,4813.94 v1(5613.94,4813.94) ; U1.21@5562.68,5010.79 5609.21,5010.79 v1(5620,5000) ; U1.7@5562.68,5286.38 5622.53,5286.38 v1@5638.07,5301.93 ; U1.5@5562.68,5325.75 5614.25,5325.75 v1(5640,5300) ; v1(5602.68,4257.32) U2.144@5635.51,4257.32 ; v1(5602.68,5477.32) U1.144@5635.51,5477.32 ; v1(5780,3370) 5792.99,3382.99 U2.45@5792.99,3422.68 ; v1(5780,4590) 5792.99,4602.99 U1.45@5792.99,4642.68 ; v1(5911.1,4201.1) U2.130@5911.1,4257.32 ; v1(5911.1,5421.1) U1.130@5911.1,5477.32 ; U2.59@6068.58,3422.68 6068.58,3458.58 v1(6090,3480) ; U1.59@6068.58,4642.68 6068.58,4678.58 v1(6090,4700) ; U2.116@6186.69,4257.32 v1(6186.69,4316.69) ; U1.116@6186.69,5477.32 v1(6186.69,5536.69) ; v1(6330,3500) 6334.49,3495.51 U2.73@6397.32,3495.51 ; v1(6330,4720) 6334.49,4715.51 U1.73@6397.32,4715.51 ; v1(6340.79,3889.21) U2.93@6397.32,3889.21 ; v1(6340.79,5109.21) U1.93@6397.32,5109.21
  Top Layer w16: v1(2200,4630) 2202.99,4632.99 U22.26@2255.75,4632.99 ; v1(2660,4600) 2661.5,4601.5 U22.7@2724.25,4601.5 ; U25.1@3195,3150 3344.88,3150 C87.2@3374.88,3180 ; U25.2@3195,3217 3323,3217 C87.2@3367.44,3172.56 ; v1@3300,3217 v1(3300,3220)
  Top Layer w20: IO.P1@2047.24,4425 v1(2115,4425) ; IO.P2@2047.24,4475 v1(2115,4475) ; IO.P3@2047.24,4525 v1(2115,4525) ; v1(2364.02,4274.02) U22.35@2364.02,4335.75 ; C81.2@2385.12,5530 2385.12,5565.12 v1(2403,5583) U23.2@2535,5583 ; 2420,5583 2420,5630 2440,5650 U23.1@2535,5650 ; v1(3155.98,5755.98) C6.1@3155.98,5820 3450,5820 U3.2@3530,5740 ; v1(4919.06,4700.94) C103.1@4919.06,4760 ; v1(5009.06,3580.94) C92.1@5009.06,3650 v1(5080,3650) ; C99.1@5369.06,3410 v1(5430,3410)
  Bottom Layer w8: v1(2200,4630) 2207.34,4622.66 C21.2@2250,4622.66 ; v1(2660,4600) 2682.66,4577.34 C27.2@2730,4577.34 ; C83.2@3473.46,4770 3473.46,4746.54 v1(3490,4730) ; C76.2@4400,3706.54 4400,3690 v1(4422.91,3667.09) ; v1(4919.06,4700.94) v1@4920,4700 ; v1(5430,3410) 5440,3400
  Bottom Layer w16: v1(3444.17,4564.17) 3450,4570 3486.54,4570 ; v1(3576.46,3686.46) 3580,3690 C84.2@3580,3740 ; C70.2@3870,4693.46 3870,4730 v1(3871.73,4731.73) ; v1(3930,3670) C74.2@3930,3706.54 ; C71.2@4020,4693.46 4020,4710 v1(4040,4730) ; v1(4070,3670) C75.2@4070,3720 ; C80.2@4363.46,4690 4363.46,4713.46 v1(4383.54,4733.54) ; C77.2@4450,3860 v1(4500,3860) ; C78.2@4473.46,4290 4483.46,4300 v1(4510,4300) ; C79.2@4473.46,4590 4510,4590 v1(4516.14,4583.86) ; v1@5600,4260 v1(5602.68,4257.32) ; v1@5600,5480 v1(5602.68,5477.32) ; v1(5613.94,3593.94) 5620,3600 C39.2@5656.54,3600 ; v1(5613.94,4813.94) 5620,4820 C11.2@5656.54,4820 ; v1(5640,4080) 5666.54,4053.46 C41.2@5666.54,4040 ; v1(5640,5300) 5666.54,5273.46 C13.2@5666.54,5260 ; C41.2@5680,4040 C41.2@5686.54,4040 ; C13.2@5680,5260 C13.2@5686.54,5260 ; C51.2@5910,4153.46 5910,4200 v1(5911.1,4201.1) ; C23.2@5910,5373.46 5911.1,5374.57 v1(5911.1,5421.1) v1@5910,5420 ; v1(6090,3480) C43.2@6090,3516.54 ; v1(6090,4700) C15.2@6090,4736.54 ; C53.2@6183.46,4360 6183.46,4319.92 v1(6186.69,4316.69) ; C25.2@6183.46,5580 6183.46,5539.92 v1(6186.69,5536.69) ; C45.2@6280,3516.54 6313.46,3516.54 v1(6330,3500) ; C17.2@6280,4736.54 6313.46,4736.54 v1(6330,4720) ; C47.2@6303.46,3890 6340,3890 v1(6340.79,3889.21) ; C19.2@6303.46,5110 6340,5110 v1(6340.79,5109.21)
  other v1: 3290,3150
pads on no net: IO.0 IO.P11 JP1.3 JP2.3 JP9.12 JP9.14 O3.1 U1.53 U1.56 U1.57 U1.62 U1.63 U1.64 U1.65 U1.70 U1.71 U1.77 U1.78 U1.79 U1.80 U1.81 U1.82 U1.86 U1.87 U1.88 U1.89 U1.94 U1.122 U1.125 U1.126 U1.127 U1.134 U1.143 U2.53 U2.56 U2.57 U2.62 U2.63 U2.64 U2.65 U2.70 U2.71 U2.77 U2.78 U2.79 U2.80 U2.81 U2.82 U2.86 U2.87 U2.88 U2.89 U2.94 U2.122 U2.125 U2.126 U2.127 U2.134 U2.143 U3.3 U5.5 U6.2 U6.3 U6.4 U6.5 U6.7 U6.9 U6.10 U6.11 U6.12 U6.13 U6.15 U6.16 U6.18 U6.21 U6.22 U6.24 U6.26 U6.27 U6.28 U6.29 U6.31 U6.33 U6.34 U6.35 U6.36 U6.37 U6.39 U6.116 U6.119 U6.120 U6.125 U6.132 U6.133 U6.135 U6.137 U6.138 U6.139 U6.140 U6.141 U6.143 U6.144 U6.146 U6.147 U6.148 U6.149 U6.150 U6.152 U6.154 U6.155 U6.156 U6.161 U6.162 U6.165 U6.166 U6.167 U6.168 U6.169 U6.171 U6.172 U6.175 U6.176 U6.178 U6.181 U6.182 U6.183 U6.184 U6.185 U6.187 U6.189 U6.197 U6.198 U6.199 U6.200 U6.205 U6.206 U22.2 U22.3 U22.5 U22.6 U22.12 U22.13 U22.14 U22.16 U22.18 U22.19 U22.20 U22.21 U22.22 U22.23 U22.27 U22.28 U22.29 U22.30 U22.31 U22.32 U22.33 U22.34 U22.41 U22.42 U22.43 U22.44

## Polygon pours and split planes (outlines as drawn)
+2.5VCC on Top Layer (solid): 4730,3050 4730,4990 3280,4990 3280,3900 2960,3900 2960,3050
GND on Top Layer (solid): 2670,5930 2670,5280 3280,5280 3280,5930
GND on Top Layer (solid): 2160,3705 2160,3055 2950,3055 2950,3705
+1.8VCC on Bottom Layer (solid): 2190,5480 2650,5480 2650,4700 2180,4700 2180,5480
+5VCC on Bottom Layer (solid): 2180,4720 2180,5480 2470,5770 7000,5770 7000,3050 7950,3050 7950,5950 1800,5950 1800,5380 2010,5380 2010,4660 2180,4660
+1.2VCC on Bottom Layer (solid): 2660,5770 2660,3050 6990,3050 6990,5760.18 2660,5760.18
GND on Internal Plane 1 (split plane): 1770.02,3020.01 1770.02,3623.09 1944.88,3623.09 ccw(c1944.88,3682.48) 2004.27,3682.48 2004.27,5317.52 ccw(c1944.88,5317.52) 1944.88,5376.9 1770.02,5376.9 1770.02,5979.98 7979.98,5979.98 7979.98,3020.01
VCC on Internal Plane 2 (split plane): 1770.02,3020.01 1770.02,3623.09 1944.88,3623.09 ccw(c1944.88,3682.48) 2004.27,3682.48 2004.27,5317.52 ccw(c1944.88,5317.52) 1944.88,5376.9 1770.02,5376.9 1770.02,5979.98 7979.98,5979.98 7979.98,3020.01

## Keep-outs
Keep-Out Layer:
  lines w10: 1800,3050 7950,3050 7950,5950 1800,5950 1800,3050

## Silkscreen, mask and mechanical layers (free items; w line width, h text height)
Top Overlay:
  rectangle: 5505,5615 5525,5715
  rectangle: 5535,5665 5555,5715
  rectangle: 5565,5615 5585,5715
  rectangle: 5625,5695 5675,5715
  rectangle: 5595,5615 5615,5685
  rectangle: 5595,5695 5615,5715
  rectangle: 5625,5615 5645,5685
  text "Soma DSP Board" at 4025,5765 h120
  text "Copyright Eric Jonas" at 4015,5665 h45
  text "2006" at 5285,5655 h50
  text "Version 3.0" at 4015,5605 h30
  text "soma.mit.edu" at 5130,5600 h30
  text "POWER" at 4040,5260 h50
  text "DSP A" at 4450,5260 h50
  text "DSP B" at 4810,5260 h50
  text "EVENT" at 5160,5260 h50
Mechanical 5:
  the board outline again, w1
Mechanical 6:
  lines w1: 2000,3000 8000,3000 8000,6000 2000,6000 2000,3000
Drill Drawing:
  text ".LEGEND" at 8200,3200 h60
  text "Drill Drawing." at 8200,3100 h60

## Dimensions
1800,3050 to 7950,3050 on Mechanical 1
1800,3050 to 1800,5950 on Mechanical 1

## Text inside footprints (layer, text, board x,y; h text height)
IO: Top Overlay "MOLEX 87703-0001" at 2202.24,3620 h30 r90
JP1: Top Overlay "2" at 6780,4930 h50 r90; Top Overlay "1" at 6880,4930 h50 r90; Top Overlay "14" at 6780,5730 h50 r90; Top Overlay "13" at 6880,5730 h50 r90
JP2: Top Overlay "2" at 6790,3930 h50 r90; Top Overlay "1" at 6890,3930 h50 r90; Top Overlay "14" at 6790,4730 h50 r90; Top Overlay "13" at 6890,4730 h50 r90